# Altium PCB PCB7.PcbDoc (part 1 of 2)
Units mm, origin at the board's own origin, x right, y up, seen from the top; angles counter-clockwise.
Board outline 94.6 x 54.68 mm, 2 copper layers (Top Layer, Bottom Layer); 56 components, 165 nets, 539 pads, 324 vias.
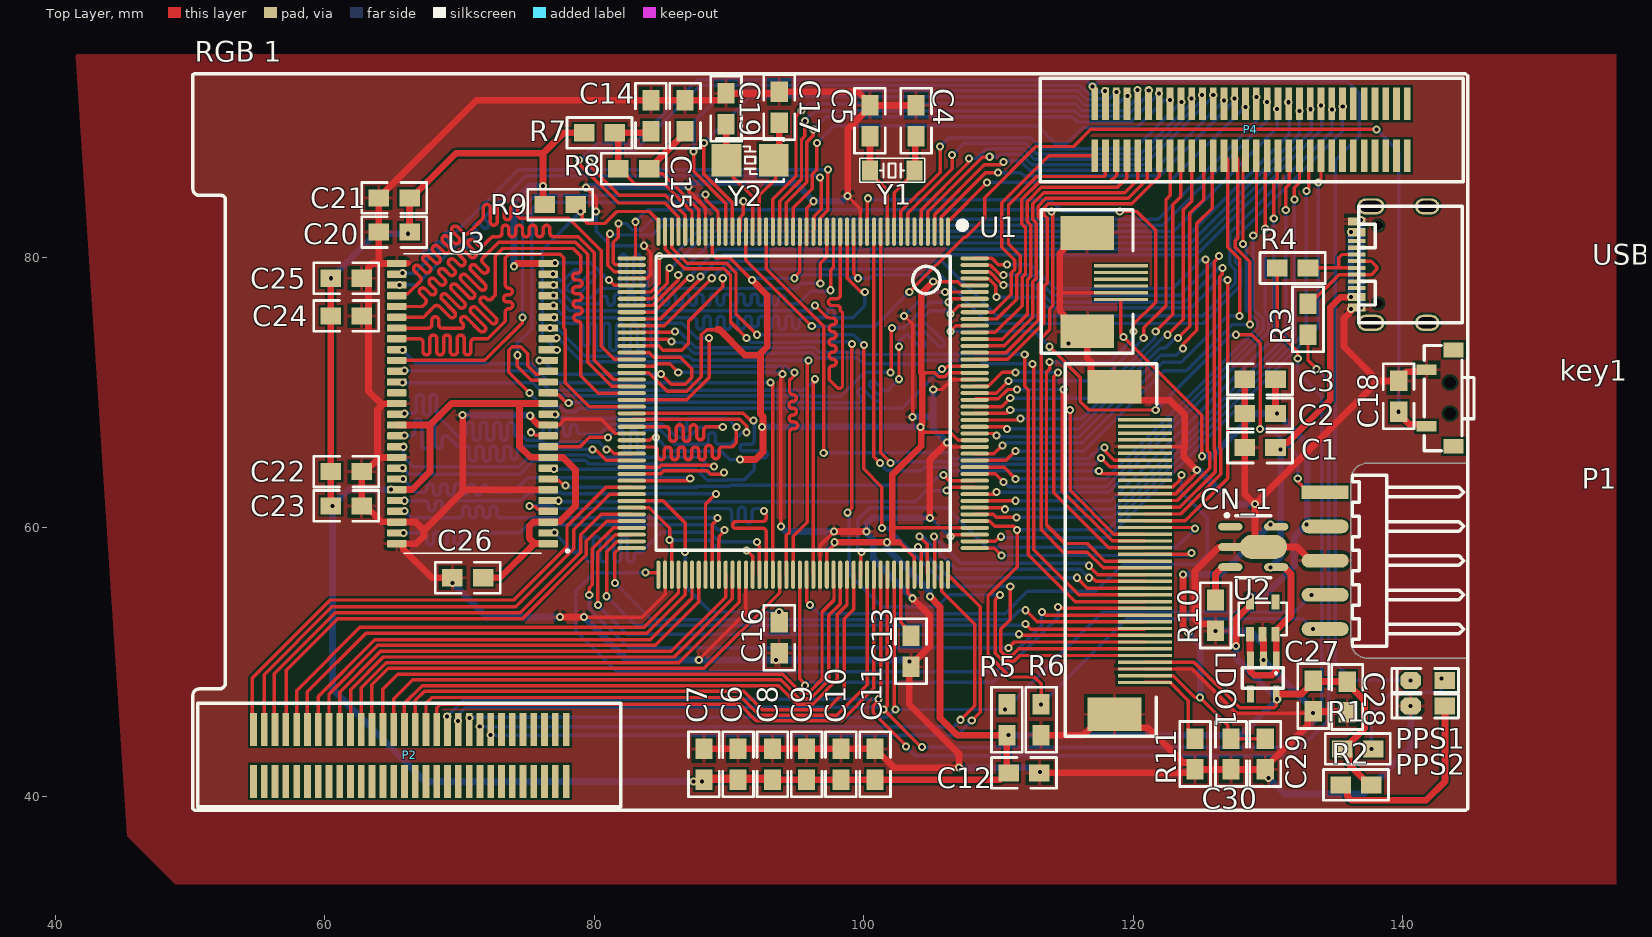
[diagram p0: Top Layer view]
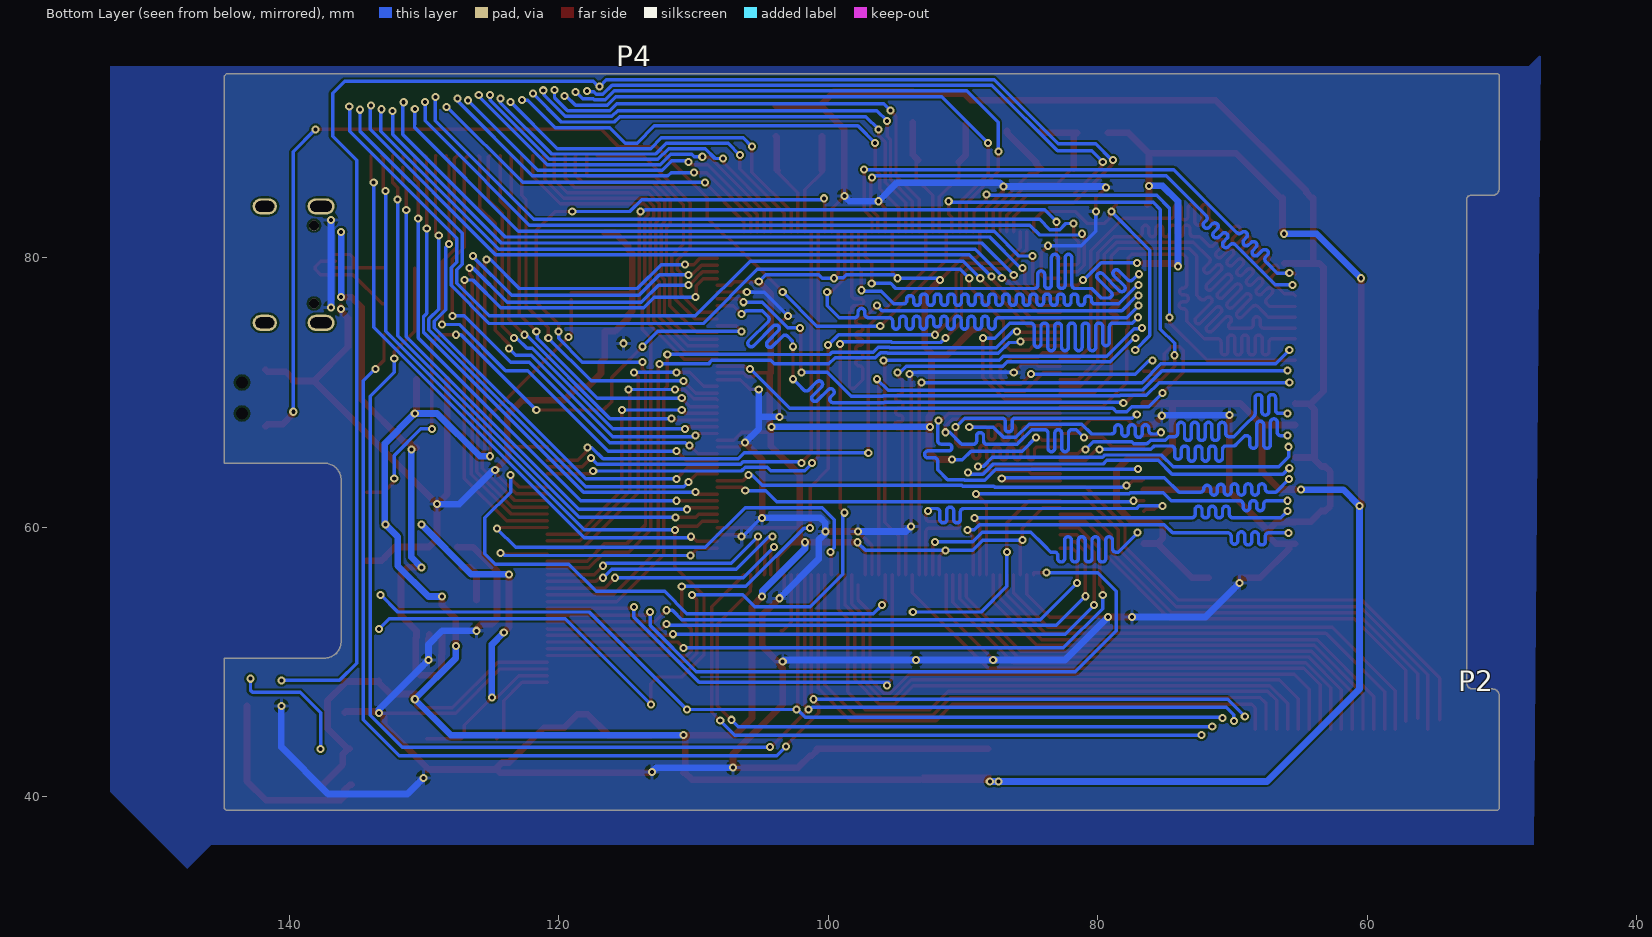
[diagram p1: Bottom Layer view, seen from below]

## Layer stack, top to bottom
Top Solder: solder mask 0.0102, Solder Resist, Dk 3.5
Top Layer: signal copper 0.0356
Dielectric 1: dielectric 0.32, FR-4, Dk 4.8
Bottom Layer: signal copper 0.0356
Bottom Solder: solder mask 0.0102, Solder Resist, Dk 3.5

## Board outline
50.215,39.109 50.334,38.99 144.678,38.99 144.812,39.124 144.812,50.26 ccw(c144.78,50.26) 144.78,50.292 137.414,50.292 cw(c137.414,51.562) 136.144,51.562 136.144,63.5 cw(c137.414,63.5) 137.414,64.77 144.78,64.77 ccw(c144.78,64.802) 144.812,64.802 144.812,93.506 144.647,93.672 50.309,93.672 50.215,93.577 50.215,85.117 ccw(c50.696,85.117) 50.696,84.635 50.687,84.633 52.306,84.633 cw(c52.306,84.311) 52.628,84.311 52.628,48.469 52.621,48.469 cw(c52.161,48.469) 52.161,48.01 50.672,48.01 50.672,48.003 ccw(c50.672,47.543) 50.213,47.543 50.215,47.55

## Design rules (kind name [scope] priority, off if disabled: settings)
Clearance [All] p1: gap=0.15 ignorepadtopadclearanceinfootprint=FALSE
Length Length_2 [InNetClass('fmc_nbl')] p1: maxlimit=49.654 minlimit=48.655
Length Length_1 [InNetClass('fmc_ba')] p2: maxlimit=37.389 minlimit=36.386
Length [InNetClass('fmc_data')] p3: maxlimit=33.236 minlimit=32.236
PolygonConnect [All] p1: connectstyle=Relief reliefconductorwidth=0.254 reliefentries=4 polygonreliefangle="90 Angle" airgapwidth=0.254
RoutingVias [All] p1: holewidth=0.711 width=1.27 viastyle="Through Hole" minholewidth=0.711 minwidth=1.27 maxholewidth=0.711 maxwidth=1.27
SolderMaskExpansion [All] p1: expansion=0.102 istentingtop=FALSE
Width [All] p1: maxlimit=1 minlimit=0.254 preferedwidth=0.254 minimp=50.000000 maximp=50.000000 favimp=50.000000
30 further rules are at their usual default settings.

## Classes and differential pairs
net class fmc_nbl: FMC_NBL0 FMC_NBL1
net class fmc_ba: FMC_BA0 FMC_BA1
net class fmc_data: FMC_D0 FMC_D1 FMC_D2 FMC_D3 FMC_D4 FMC_D5 FMC_D6 FMC_D7 FMC_D8 FMC_D9 FMC_D10 FMC_D11 FMC_D12 FMC_D13 FMC_D14 FMC_D15
net class fmc_add: FMC_A0 FMC_A1 FMC_A2 FMC_A3 FMC_A4 FMC_A5 FMC_A6 FMC_A7 FMC_A8 FMC_A9 FMC_A10 FMC_A11 FMC_A12

## Components (designator, comment, footprint, x,y, rotation, side; value= is the part's Value field where it differs from the comment)
C1 "Cap Semi" 0805C 130.556,65.913 r180 top value=105
C2 "Cap Semi" 0805C 128.27,68.453 r0 top value=104
C3 "Cap Semi" 0805C 128.27,70.993 r0 top value=105
C4 "" 0805C 103.886,91.313 r270 top value=10P
C5 "" 0805C 100.457,91.313 r270 top value=10P
C6 "" 0805C 90.678,41.275 r90 top value=104
C7 "" 0805C 88.138,41.275 r90 top value=104
C8 "" 0805C 93.218,41.275 r90 top value=104
C9 "" 0805C 95.758,41.275 r90 top value=104
C10 "" 0805C 98.298,41.275 r90 top value=104
C11 "" 0805C 100.838,41.275 r90 top value=106
C12 "" 0805C 110.744,41.783 r0 top value=104
C13 "" 0805C 103.505,51.943 r270 top value=2.2UF
C14 "" 0805C 84.201,91.694 r270 top value=104
C15 "" 0805C 86.741,89.408 r90 top value=104
C16 "" 0805C 93.726,52.959 r270 top value=2.2UF
C17 "" 0805C 93.726,90.043 r90 top value=20P
C18 "" 0805C 139.7,70.866 r270 top value=104
C19 "" 0805C 89.789,89.916 r90 top value=20P
C20 "104" 0805C 64.008,81.915 r0 top
C21 "104" 0805C 64.008,84.455 r0 top
C22 "104" 0805C 62.738,64.135 r180 top
C23 "104" 0805C 62.738,61.595 r180 top
C24 "104" 0805C 62.738,75.692 r180 top
C25 "104" 0805C 62.738,78.486 r180 top
C26 "104" 0805C 69.469,56.261 r0 top
C27 "105" 0805C 133.358,46.34 r90 top value=104
C28 "104" 0805C 135.881,46.268 r90 top
C29 "106" 0805C 129.794,44.323 r270 top value=104
C30 "106" 0805C 127.254,44.323 r270 top value=104
CN_1 "CN5710" LC-SOT-89-5 128.905,58.547 r180 top
key1 "KEY" "TSW 3*6*4.3-S-W" 143.51,69.596 r90 top
LDO1 "RT9193-33" SOT-23-5 128.067,48.514 r270 top
P1 "Header 5" HDR2.54-WS-5P 134.239,57.531 r270 top
P2 "Header 30X2" BTB60 66.308,43.053 r90 bottom
P4 "Header 30X2" BTB60 128.741,89.535 r270 bottom locked
PPS1 "LED" "LED 0805G" 141.859,48.641 r180 top
PPS2 "LED" "LED 0805G" 141.859,46.736 r180 top
R1 "1k" 0805R 137.795,43.561 r180 top
R2 "1k" 0805R 135.382,40.894 r0 top
R3 "0Ω" 0805R 132.969,76.581 r270 top
R4 "0Ω" 0805R 132.969,79.248 r180 top
R5 "10K" 0805R 110.617,44.577 r90 top
R6 "10K" 0805R 113.157,44.577 r90 top
R7 "0" 0805R 79.248,89.281 r0 top
R8 "0" 0805R 81.788,86.614 r0 top
R9 "10K" 0805R 76.327,83.947 r0 top
R10 "12K" 0805R 126.111,52.324 r90 top
R11 "0R" 0805R 124.587,44.323 r270 top
"RGB 1" "RGB800X480" RGB_800x480 50.239,39.017 r0 top locked
U1 "STM32H743IIT6" "LQFP176 24x24_M" 95.504,69.215 r180 top locked
U2 "RT9013" SOT23-5 129.606,53.27 r0 top
U3 "W9825G6KH-6" SOP80P1176X120-54N 70.961,69.189 r180 top locked
USBC1 "TYPE-C 3.1" TYPE-C-USB-17 139.192,79.502 r90 top
Y1 "32.768KHz" "OSC 3215-2P" 102.109,86.487 r0 top
Y2 "25M" "OSC 5032-2P" 91.567,87.249 r0 top

## Footprints (in the part's own frame and the unit in brackets; to place one, negate y for a bottom-side part, rotate by r counter-clockwise, add the part's x,y. Pads: shape width x height; smd on the part's side, far side on the other; paste and mask are expansions set on the pad)
0805C [mil] "2.0mmx1.2mm（蒜米工坊）"
  rect 60x50 smd: 1(0,0) 2(90,0)
  silkscreen extent -50,-45 140,45, body extent 5,-25 83,25, height 22
0805R [mil]
  rect 60x50 smd: 1(0,0) 2(90,0)
  silkscreen extent -50,-45 140,45, body extent 5,-25 83,25, height 22
BTB60 [mm]
  rect 2.44x0.5 smd far side: 1(-1.905,-11.594) 2(1.955,-11.594) 3(-1.905,-10.794) 4(1.955,-10.794) 5(-1.905,-9.994) 6(1.955,-9.994) 7(-1.905,-9.194) 8(1.955,-9.194) 9(-1.905,-8.394) 10(1.955,-8.394) 11(-1.905,-7.594) 12(1.955,-7.594) 13(-1.905,-6.794) 14(1.955,-6.794) 15(-1.905,-5.994) 16(1.955,-5.994) 17(-1.905,-5.194) 18(1.955,-5.194) 19(-1.905,-4.394) 20(1.955,-4.394) 21(-1.905,-3.594) 22(1.955,-3.594) 23(-1.905,-2.794) 24(1.955,-2.794) 25(-1.905,-1.994) 26(1.955,-1.994) 27(-1.905,-1.194) 28(1.955,-1.194) 29(-1.905,-0.394) 30(1.955,-0.394) 31(-1.905,0.406) 32(1.955,0.406) 33(-1.905,1.206) 34(1.955,1.206) 35(-1.905,2.006) 36(1.955,2.006) 37(-1.905,2.806) 38(1.955,2.806) 39(-1.905,3.606) 40(1.955,3.606) 41(-1.905,4.406) 42(1.955,4.406) 43(-1.905,5.206) 44(1.955,5.206) 45(-1.905,6.006) 46(1.955,6.006) 47(-1.905,6.806) 48(1.955,6.806) 49(-1.905,7.606) 50(1.955,7.606) 51(-1.905,8.406) 52(1.955,8.406) 53(-1.905,9.206) 54(1.955,9.206) 55(-1.905,10.006) 56(1.955,10.006) 57(-1.905,10.806) 58(1.955,10.806) 59(-1.905,11.606) 60(1.955,11.606)
HDR2.54-WS-5P [mm] "5P卧式贴片排针2.54"
  rect 1.02x3.5 smd: 1(-5.08,0)
  oval 1.02x3.5 smd: 2(-2.54,0) 3(0,0) 4(2.54,0) 5(5.08,0)
  silkscreen extent -6.35,2.03 6.35,10.29, body extent -6.35,-0.76 6.35,10.34, height 2.54
LC-SOT-89-5 [mm]
  oval 1.8x0.58 smd: 1(1.7,-1.5) 3(1.7,1.5) 4(-1.7,1.5) 5(-1.7,-1.5)
  oval 3.5x1.8 smd: 2(-0.75,0)
  oval 2.4x0.58 smd: 2(1.4,0)
  silkscreen extent -1.3,-2.47 2.07,2.3, body extent -2.17,-2.25 2.18,2.25, height 1.5
"LED 0805G" [mil] "绿色0805LED"
  rect 60x50 smd: 1(-50,0)
  oct 60x50 smd: 2(50,0)
  silkscreen extent -90,-35 105,35, body extent -39,-25 39,25, height 32
"LQFP176 24x24_M" [mm] "176脚，体宽24x24mm，脚距0.5mm"
  oval 0.3x2.1 smd: 1(-10.75,-12.727) 2(-10.25,-12.727) 3(-9.75,-12.727) 4(-9.25,-12.727) 5(-8.75,-12.727) 6(-8.25,-12.727) 7(-7.75,-12.727) 8(-7.25,-12.727) 9(-6.75,-12.727) 10(-6.25,-12.727) 11(-5.75,-12.727) 12(-5.25,-12.727) 13(-4.75,-12.727) 14(-4.25,-12.727) 15(-3.75,-12.727) 16(-3.25,-12.727) 17(-2.75,-12.727) 18(-2.25,-12.727) 19(-1.75,-12.727) 20(-1.25,-12.727) 21(-0.75,-12.727) 22(-0.25,-12.727) 23(0.25,-12.727) 24(0.75,-12.727) 25(1.25,-12.727) 26(1.75,-12.727) 27(2.25,-12.727) 28(2.75,-12.727) 29(3.25,-12.727) 30(3.75,-12.727) 31(4.25,-12.727) 32(4.75,-12.727) 33(5.25,-12.727) 34(5.75,-12.727) 35(6.25,-12.727) 36(6.75,-12.727) 37(7.25,-12.727) 38(7.75,-12.727) 39(8.25,-12.727) 40(8.75,-12.727) 41(9.25,-12.727) 42(9.75,-12.727) 43(10.25,-12.727) 44(10.75,-12.727) 89(10.75,12.727) 90(10.25,12.727) 91(9.75,12.727) 92(9.25,12.727) 93(8.75,12.727) 94(8.25,12.727) 95(7.75,12.727) 96(7.25,12.727) 97(6.75,12.727) 98(6.25,12.727) 99(5.75,12.727) 100(5.25,12.727) 101(4.75,12.727) 102(4.25,12.727) 103(3.75,12.727) 104(3.25,12.727) 105(2.75,12.727) 106(2.25,12.727) 107(1.75,12.727) 108(1.25,12.727) 109(0.75,12.727) 110(0.25,12.727) 111(-0.25,12.727) 112(-0.75,12.727) 113(-1.25,12.727) 114(-1.75,12.727) 115(-2.25,12.727) 116(-2.75,12.727) 117(-3.25,12.727) 118(-3.75,12.727) 119(-4.25,12.727) 120(-4.75,12.727) 121(-5.25,12.727) 122(-5.75,12.727) 123(-6.25,12.727) 124(-6.75,12.727) 125(-7.25,12.727) 126(-7.75,12.727) 127(-8.25,12.727) 128(-8.75,12.727) 129(-9.25,12.727) 130(-9.75,12.727) 131(-10.25,12.727) 132(-10.75,12.727)
  oval 2.1x0.3 smd: 45(12.727,-10.75) 46(12.727,-10.25) 47(12.727,-9.75) 48(12.727,-9.25) 49(12.727,-8.75) 50(12.727,-8.25) 51(12.727,-7.75) 52(12.727,-7.25) 53(12.727,-6.75) 54(12.727,-6.25) 55(12.727,-5.75) 56(12.727,-5.25) 57(12.727,-4.75) 58(12.727,-4.25) 59(12.727,-3.75) 60(12.727,-3.25) 61(12.727,-2.75) 62(12.727,-2.25) 63(12.727,-1.75) 64(12.727,-1.25) 65(12.727,-0.75) 66(12.727,-0.25) 67(12.727,0.25) 68(12.727,0.75) 69(12.727,1.25) 70(12.727,1.75) 71(12.727,2.25) 72(12.727,2.75) 73(12.727,3.25) 74(12.727,3.75) 75(12.727,4.25) 76(12.727,4.75) 77(12.727,5.25) 78(12.727,5.75) 79(12.727,6.25) 80(12.727,6.75) 81(12.727,7.25) 82(12.727,7.75) 83(12.727,8.25) 84(12.727,8.75) 85(12.727,9.25) 86(12.727,9.75) 87(12.727,10.25) 88(12.727,10.75) 133(-12.727,10.75) 134(-12.727,10.25) 135(-12.727,9.75) 136(-12.727,9.25) 137(-12.727,8.75) 138(-12.727,8.25) 139(-12.727,7.75) 140(-12.727,7.25) 141(-12.727,6.75) 142(-12.727,6.25) 143(-12.727,5.75) 144(-12.727,5.25) 145(-12.727,4.75) 146(-12.727,4.25) 147(-12.727,3.75) 148(-12.727,3.25) 149(-12.727,2.75) 150(-12.727,2.25) 151(-12.727,1.75) 152(-12.727,1.25) 153(-12.727,0.75) 154(-12.727,0.25) 155(-12.727,-0.25) 156(-12.727,-0.75) 157(-12.727,-1.25) 158(-12.727,-1.75) 159(-12.727,-2.25) 160(-12.727,-2.75) 161(-12.727,-3.25) 162(-12.727,-3.75) 163(-12.727,-4.25) 164(-12.727,-4.75) 165(-12.727,-5.25) 166(-12.727,-5.75) 167(-12.727,-6.25) 168(-12.727,-6.75) 169(-12.727,-7.25) 170(-12.727,-7.75) 171(-12.727,-8.25) 172(-12.727,-8.75) 173(-12.727,-9.25) 174(-12.727,-9.75) 175(-12.727,-10.25) 176(-12.727,-10.75)
  silkscreen extent -12.06,-13.46 10.92,10.92, body extent -13,-13 13,13, height 1.45
"OSC 3215-2P" [mm] "3.2*1.5*0.6mm(长宽高)"
  rect 1.2x1.5 smd: 1(-1.65,0) 2(1.65,0)
  silkscreen extent -2.41,-0.89 2.41,0.89, body extent -1.6,-0.75 1.6,0.75, height 0.61
"OSC 5032-2P" [mm] "5mm*3.2mm*0.8mm(长*宽*高)"
  rect 2.2x2.4 smd: 1(-1.75,0) 2(1.75,0)
  silkscreen extent -2.5,-1.6 2.5,1.6, body extent -2.5,-1.6 2.5,1.6, height 0.86
RGB_800x480 [mm]
  rect 4x0.25 smd: 1(70.618,9.474) 2(70.618,9.974) 3(70.618,10.474) 4(70.618,10.974) 5(70.618,11.474) 6(70.618,11.974) 7(70.618,12.474) 8(70.618,12.974) 9(70.618,13.474) 10(70.618,13.974) 11(70.618,14.474) 12(70.618,14.974) 13(70.618,15.474) 14(70.618,15.974) 15(70.618,16.474) 16(70.618,16.974) 17(70.618,17.474) 18(70.618,17.974) 19(70.618,18.474) 20(70.618,18.974) 21(70.618,19.474) 22(70.618,19.974) 23(70.618,20.474) 24(70.618,20.974) 25(70.618,21.474) 26(70.618,21.974) 27(70.618,22.474) 28(70.618,22.974) 29(70.618,23.474) 30(70.618,23.974) 31(70.618,24.474) 32(70.618,24.974) 33(70.618,25.474) 34(70.618,25.974) 35(70.618,26.474) 36(70.618,26.974) 37(70.618,27.474) 38(70.618,27.974) 39(70.618,28.474) 40(70.618,28.974) 41(68.848,40.394) 42(68.848,39.894) 43(68.848,39.394) 44(68.848,38.894) 45(68.848,38.394) 46(68.848,37.894)
  rect 4x2.5 smd: G1(68.371,7.112) G2(68.371,31.412) G3(66.347,35.532) G4(66.347,42.832)
  silkscreen extent -0.02,-0.02 94.58,54.66
SOP80P1176X120-54N [mm]
  rrect25% 1.44x0.54 smd: 1(-5.62,10.4) 2(-5.62,9.6) 3(-5.62,8.8) 4(-5.62,8) 5(-5.62,7.2) 6(-5.62,6.4) 7(-5.62,5.6) 8(-5.62,4.8) 9(-5.62,4) 10(-5.62,3.2) 11(-5.62,2.4) 12(-5.62,1.6) 13(-5.62,0.8) 14(-5.62,0) 15(-5.62,-0.8) 16(-5.62,-1.6) 17(-5.62,-2.4) 18(-5.62,-3.2) 19(-5.62,-4) 20(-5.62,-4.8) 21(-5.62,-5.6) 22(-5.62,-6.4) 23(-5.62,-7.2) 24(-5.62,-8) 25(-5.62,-8.8) 26(-5.62,-9.6) 27(-5.62,-10.4) 28(5.62,-10.4) 29(5.62,-9.6) 30(5.62,-8.8) 31(5.62,-8) 32(5.62,-7.2) 33(5.62,-6.4) 34(5.62,-5.6) 35(5.62,-4.8) 36(5.62,-4) 37(5.62,-3.2) 38(5.62,-2.4) 39(5.62,-1.6) 40(5.62,-0.8) 41(5.62,0) 42(5.62,0.8) 43(5.62,1.6) 44(5.62,2.4) 45(5.62,3.2) 46(5.62,4) 47(5.62,4.8) 48(5.62,5.6) 49(5.62,6.4) 50(5.62,7.2) 51(5.62,8) 52(5.62,8.8) 53(5.62,9.6) 54(5.62,10.4)
  silkscreen extent -7.16,-11.11 5.08,11.11, body extent -5.88,-11.11 5.88,11.11, height 1.2
SOT23-5 [mm]
  rect 0.6x1.1 smd: 1(-0.95,-1.2) 2(0,-1.2) 3(0.95,-1.2) 4(0.95,1.2) 5(-0.95,1.2)
  silkscreen extent -1.78,-1.27 1.78,1.14, body extent -1.55,-0.9 1.55,0.9, height 1.45
SOT-23-5 [mil]
  rect 50x20 smd: 1(-65,100) 2(-65,63) 3(-65,25) 4(35,25) 5(35,100)
  silkscreen extent -42,1 18,121
"TSW 3*6*4.3-S-W" [mm] "侧立贴片3*6*4.3"
  rect 1.1x1.5 smd: 0(-3.575,-0.25) 0(3.575,-0.25)
  round 0 hole 0.9: 0(-1.15,0) 0(1.15,0)
  rect 0.8x1.5 smd: 1(2.1,1.75) 2(-2.1,1.75)
  silkscreen extent -3.9,-1.78 3.9,1.91, body extent -3.9,-1.79 3.9,1.91, height 3.51
TYPE-C-USB-17 [mm]
  oval 1.2x1.8 hole 0.8 slot 1.4 at 90 deg: 0(-4.32,-2.624) 0(4.32,-2.624)
  oval 1.2x2 hole 0.8 slot 1.6 at 90 deg: 0(-4.32,1.556) 0(4.32,1.556)
  rect 0.3x1.3 smd: A1(-3.35,2.623) A4(-2.55,2.623) A5(-1.25,2.623) A6(-0.25,2.623) A7(0.25,2.623) A8(-1.75,2.624) A9(2.55,2.623) A12(3.35,2.623) B1(3.05,2.623) B4(2.25,2.623) B5(1.75,2.623) B6(0.75,2.623) B7(-0.75,2.623) B8(1.25,2.624) B9(-2.25,2.623) B12(-3.05,2.623)
  round 0.75 hole 0.75 unplated: ""(-2.89,1.026) ""(2.89,1.026)
  silkscreen extent -4.32,-5.23 4.32,2.47

## Part data
C1 C2 C3: "Capacitor (Semiconductor SIM Model)", LatestRevisionDate=29-May-2009, LatestRevisionNote="IPC-7351 Footprint Added.", PackageDescription="Chip Capacitor", PackageReference=C1206, Published=8-Jun-2000, Publisher="Altium Limited"
C4 C5 C6 C7 C8 C9 C10 C11 C13 C14 C15 C16 C17 C18 C19: library part Cap_1_1, "Capacitor", LatestRevisionDate=17-Jul-2002, LatestRevisionNote="Re-released for DXP Platform.", PackageDescription="Radial Cap, Thru-Hole; 2 Leads; 0.3 in Pin Spacing", PackageReference=RAD-0.3, Published=8-Jun-2000, Publisher="Altium Limited"
C12: library part Cap_1_1, "104", LatestRevisionDate=17-Jul-2002, LatestRevisionNote="Re-released for DXP Platform.", PackageDescription="Radial Cap, Thru-Hole; 2 Leads; 0.3 in Pin Spacing", PackageReference=RAD-0.3, Published=8-Jun-2000, Publisher="Altium Limited"
C20 C21 C22 C23 C24 C25 C26: library part CAP, "无极性电容"
C27 C28 C29 C30: library part Cap, "Capacitor", LatestRevisionDate=17-Jul-2002, LatestRevisionNote="Re-released for DXP Platform.", Published=8-Jun-2000, Publisher="Altium Limited"
LDO1: "3.3V超低压差LDO"
P1: "Header, 5-Pin"
P2 P4: "Header, 30-Pin, Dual row", LatestRevisionDate=17-Jul-2002, LatestRevisionNote="Re-released for DXP Platform.", Publisher="Altium Limited"
R1 R2 R3 R4 R5 R6 R7 R8: library part RES, "Resistor", LatestRevisionDate=17-Jul-2002, LatestRevisionNote="Re-released for DXP Platform.", PackageDescription="Axial Device, Thru-Hole; 2 Leads; 0.4 in Pin Spacing", PackageReference=AXIAL-0.4, Published=8-Jun-2000, Publisher="Altium Limited"
R9: library part RES
R10 R11: library part Res2, "Resistor", LatestRevisionDate=17-Jul-2002, LatestRevisionNote="Re-released for DXP Platform.", Published=8-Jun-2000, Publisher="Altium Limited"
"RGB 1": library part RGB_800X480
U1: BOM_LCSC Assembly=Yes, BOM_Manufacturer=STMicroelectronics, BOM_Manufacturer Part=STM32H743IIT6, BOM_Supplier=LCSC, BOM_Supplier Part=C89597, Contributor=LCSC, SMT Type=Extend, spicePre=U, spiceSymbolName=STM32H743IIT6
U3: library part IS42S16160B, "32MB SDRAM"
Y1 Y2: library part XTAL, "Crystal Oscillator", LatestRevisionDate=17-Jul-2002, LatestRevisionNote="Re-released for DXP Platform.", Published=8-Jun-2000, Publisher="Altium Limited"

## Via types
v1: diameter 0.6, hole 0.3, Top Layer to Bottom Layer, 324 vias

## Nets (pads, with @x,y where several pads share a name; then routed paths per layer and width w, separated by ;. In a path a pad name is that pad's centre, name@x,y a point inside that pad or via, vN(x,y) a via of type N, cw(c..) or ccw(c..) an arc to the next point about the centre after c; other vN are vias at no path point)
3.3V: "RGB 1.4" "RGB 1.46" C2.2 C3.2 C6.1 C7.1 C8.1 C9.1 C10.1 C11.1 C12.1 C20.2 C21.2 C22.2 C23.2 C24.2 C25.2 C26.2 C27.2 C28.2 LDO1.5 P1.2 R1.2 R2.2 R5.1 R7.1 R9.1 U1.15 U1.23 U1.36 U1.49 U1.62 U1.72 U1.82 U1.91 U1.103 U1.114 U1.127 U1.136 U1.149 U1.159 U1.172 U2.5 U3.1 U3.3 U3.9 U3.14 U3.27 U3.43 U3.49 | length 437.6
  Top Layer w0.254: v1(81.09,78.359) 81.483,77.965 U1.49@82.777,77.965 ; U1.82@82.777,61.465 84.069,61.465 85.598,59.936 v1(85.598,59.055) 85.754,58.899 U1.91@85.754,56.488 ; U1.72@82.777,66.465 84.118,66.465 84.328,66.675 v1(84.582,66.675) ; U1.62@82.777,71.465 84.056,71.465 85.417,70.104 86.868,70.104 87.942,71.178 87.942,74.28 88.338,74.676 89.154,74.676 ; U1.36@88.754,81.942 88.754,80.283 89.027,80.01 90.043,80.01 v1(91.694,78.359) ; v1(91.313,58.293) 91.754,57.852 U1.103@91.754,56.488 ; v1(94.869,78.486) 94.869,78.58 95.254,78.965 U1.23@95.254,81.942 ; U1.114@97.254,56.488 97.254,58.171 97.838,58.755 v1(97.838,58.896) ; U1.15@99.254,81.942 99.245,81.933 99.245,78.809 v1(99.568,78.486) ; 102.108,59.965 U1.136@108.231,59.965 ; 102.616,58.928 103.754,57.79 U1.127@103.754,56.488 ; 104.267,67.056 106.426,67.056 107.008,66.474 108.222,66.474 U1.149@108.231,66.465 ; 104.267,71.465 105.265,71.465 105.552,71.178 106.03,71.178 106.317,71.465 U1.159@108.231,71.465 ; v1(105.156,78.232) 106.96,78.232 107.227,77.965 U1.172@108.231,77.965 ; 119.087,76.911 119.087,74.328 v1(119.291,74.124) 125.095,68.32 v1(125.095,65.278) ; 120.857,49.991 124.507,49.991 127.889,46.609 130.458,46.609 130.607,46.758 LDO1.5@130.607,47.625
  Top Layer w0.5: C23.2@60.452,61.595 C22.2@60.452,64.135 C24.2@60.452,75.692 v1(60.452,78.486) ; U3.49@65.341,62.789 65.361,62.809 66.492,62.809 67.818,64.135 67.818,67.589 ; U3.43@65.341,67.589 67.818,67.589 ; C20.2@66.294,81.915 C21.2@66.294,84.455 66.421,84.455 69.723,87.757 76.2,87.757 ; C26.2@71.755,56.261 73.009,56.261 75.557,58.809 ; v1(74.041,79.375) 74.255,79.589 U3.27@76.581,79.589 ; R9.1@76.327,83.947 76.2,84.074 v1(76.2,85.344) 76.2,87.757 ; U3.1@76.581,58.789 76.561,58.809 75.557,58.809 ; U3.14@76.581,69.189 74.447,69.189 ; R7.1@79.248,89.281 77.724,89.281 76.2,87.757 ; 89.154,74.676 89.281,74.676 91.186,72.771 92.202,72.771 92.329,72.898 ; v1(90.805,65.024) 90.824,65.043 91.967,65.043 92.521,65.597 92.521,67.345 92.475,67.391 92.475,67.41 v1@92.502,67.437 ; v1(91.694,78.359) 92.837,77.216 92.837,73.406 92.329,72.898 ; v1@92.521,67.437 92.521,68.235 92.329,68.427 92.329,72.898 ; C8.1@93.218,41.275 C9.1@95.758,41.275 C10.1@98.298,41.275 C11.1@100.838,41.275 110.109,41.275 110.617,41.783 C12.1@110.744,41.783 110.617,41.91 R5.1@110.617,44.577 106.934,44.577 105.664,45.847 105.664,54.102 v1(104.902,54.864) ; v1@97.885,58.896 102.108,58.896 ; 102.584,58.896 102.108,58.896 ; v1(105.156,78.232) 104.267,77.343 104.267,71.465 104.332,71.4 104.332,67.656 104.159,67.483 104.159,67.464 104.186,67.437 104.159,67.41 104.159,67.391 104.267,67.283 104.267,67.056 104.267,66.04 102.108,63.881 102.108,59.965 102.108,58.896 ; v1(127.635,51.181) 127.635,53.199 128.656,54.22 U2.5@128.656,54.47 ; C2.2@130.556,68.453 C3.2@130.556,70.993 ; LDO1.5@130.607,47.625 132.484,47.625 133.358,48.499 C27.2@133.358,48.626 133.43,48.554 C28.2@135.881,48.554 135.881,48.427 137.16,47.148 137.16,45.085 R1.2@135.636,43.561 ; R1.2@135.509,43.561 R1.2@135.636,43.561 ; R2.2@137.668,40.894 137.541,40.894 136.021,42.414 136.021,43.176 R1.2@135.636,43.561 ; 67.818,67.589 69.418,69.189 74.447,69.189 ; 74.447,69.189 74.447,66.015 75.253,65.209 76.561,65.209 U3.9@76.581,65.189 77.686,65.189 78.613,64.262 78.613,61.595 77.427,60.409 76.601,60.409 U3.3@76.581,60.389 75.477,60.389 75.184,60.096 75.184,59.182 75.557,58.809
  Bottom Layer w0.254: v1(77.089,79.629) 79.756,79.629 81.026,78.359 v1(81.09,78.359) ; v1(84.582,66.675) 85.598,65.659 89.408,65.659 90.043,65.024 v1(90.805,65.024) ; v1(85.598,59.055) 88.519,59.055 89.281,58.293 v1(91.313,58.293) 97.234,58.293 v1(97.838,58.896) ; v1(91.694,78.359) 91.821,78.486 v1(94.869,78.486) 95.123,78.74 98.679,78.74 98.887,78.532 99.522,78.532 v1(99.568,78.486) 100.457,78.486 100.711,78.74 104.648,78.74 v1(105.156,78.232)
  Bottom Layer w0.5: v1(60.452,78.486) 63.754,81.788 v1(66.167,81.788) ; v1(64.923,62.796) 61.78,62.796 v1(60.579,61.595) 60.579,48.006 67.437,41.148 v1(87.376,41.148) v1(88.011,41.148) ; v1(74.041,79.375) 74.041,84.201 75.184,85.344 v1(76.2,85.344) ; v1(92.456,67.437) 92.48,67.461 v1(104.217,67.461) ; v1(101.718,58.896) 101.718,58.429 104.902,55.245 v1(104.902,54.864) ; v1(110.744,44.577) 128.016,44.577 v1(130.683,47.244) 127.635,50.292 v1(127.635,51.181) ; v1(125.095,65.278) 125.857,65.278 129.032,68.453 v1(130.683,68.453) ; v1(128.651,54.864) 129.667,54.864 131.953,57.15 131.953,59.309 v1(132.842,60.198) 132.907,60.263 132.907,66.229 v1@130.81,68.326
5V: C1.1 CN_1.4 LDO1.1 LDO1.3 U2.1 U2.3 USBC1.A4 USBC1.A9 USBC1.B4 USBC1.B9 | length 42.2
  Top Layer w0.5: U2.1@128.656,52.07 128.656,50.592 128.702,50.546 LDO1.3@128.702,50.165 128.706,50.161 128.706,49.315 128.999,49.022 129.413,49.022 130.302,49.022 130.603,49.323 130.603,50.161 LDO1.1@130.607,50.165 130.607,51.769 130.556,51.82 U2.3@130.556,52.07 130.556,52.32 131.699,53.463 131.699,56.541 131.193,57.047 CN_1.4@130.605,57.047 ; C1.1@130.556,65.913 130.937,65.913 130.937,66.167 131.068,66.298 131.449,66.298 134.62,69.469 134.62,76.327 135.363,77.07 136.125,77.07 v1(136.144,77.089)
  Bottom Layer w0.5: v1(130.175,57.023) 130.937,57.785 v1(130.937,65.786) ; v1(136.144,77.089) v1(136.144,81.915)
BOOT0: P1.1 U1.166 | length 45.2
  Top Layer w0.254: v1(106.426,74.549) 106.842,74.965 U1.166@108.231,74.965 ; v1(113.792,73.406) 116.078,71.12 116.078,69.319 116.69,68.707 v1(121.666,68.707) ; v1(127.635,74.295) 128.778,74.295 129.413,73.66 v1(129.413,67.31) ; v1@132.095,63.515 132.999,62.611 P1.1@134.239,62.611
  Bottom Layer w0.254: v1(106.426,74.549) 112.649,74.549 v1(113.792,73.406) ; v1(121.666,68.707) 127.254,74.295 v1(127.635,74.295) ; v1(129.413,67.31) 130.229,67.31 132.207,65.332 v1(132.207,63.627)
C0: U1.32 U3.16 | length 33.2
  Top Layer w0.254: v1(74.295,72.771) 74.295,71.945 75.308,70.932 76.438,70.932 U3.16@76.581,70.789 ; U1.32@90.754,81.942 90.827,82.015 90.827,83.019 91.059,83.251 v1(91.059,84.201)
  Bottom Layer w0.254: v1(74.295,72.771) 74.295,73.66 75.352,74.717 75.352,83.59 75.888,84.127 90.74,84.127 90.748,84.135 90.993,84.135 v1(91.059,84.201)
C1: P4.53 U1.33 | length 40.8
  Top Layer w0.254: v1(88.138,88.519) 88.138,86.223 90.254,84.107 U1.33@90.254,81.942
  Bottom Layer w0.254: v1(88.138,88.519) 91.567,91.948 115.77,91.948 116.393,91.325 118.757,91.325 v1@119.507,92.075
  other v1: 119.565,92.022
C2: P4.55 U1.34 | length 42
  Top Layer w0.254: v1(87.376,87.884) 87.376,86.414 89.754,84.036 U1.34@89.754,81.942
  Bottom Layer w0.254: v1(87.376,87.884) 87.376,90.076 89.709,92.409 115.88,92.409 116.561,91.729 117.373,91.729 117.451,91.806 118.222,91.806 v1@118.745,92.329
  other v1: 118.767,92.308
C3: U1.35 U3.37 | length 36.2
  Top Layer w0.254: U3.37@65.341,72.389 71.881,72.389 74.676,75.184 v1(74.676,75.565) ; v1(88.265,84.709) 88.265,84.328 89.181,83.412 89.181,82.015 U1.35@89.254,81.942
  Bottom Layer w0.254: v1(74.676,75.565) 74.676,83.693 75.623,84.64 88.196,84.64 v1(88.265,84.709)
FMC_A0: U1.16 U3.23 | length 42.3
  Top Layer w0.254: U1.16@98.754,81.942 98.763,81.933 98.763,78.475 99.768,77.47 v1(100.076,77.47)
  Bottom Layer w0.254: v1(76.962,76.454) 77.851,75.565 81.633,75.565 87.348,75.565 cw(c87.348,75.311) 87.602,75.311 87.602,74.963 ccw(c87.856,74.963) 88.11,74.963 88.11,75.415 cw(c88.364,75.415) 88.618,75.415 88.618,74.963 ccw(c88.872,74.963) 89.126,74.963 89.126,75.415 cw(c89.38,75.415) 89.634,75.415 89.634,74.963 ccw(c89.888,74.963) 90.142,74.963 90.142,75.415 cw(c90.396,75.415) 90.65,75.415 90.65,74.963 ccw(c90.904,74.963) 91.158,74.963 91.158,75.415 cw(c91.412,75.415) 91.666,75.415 91.666,75.126 ccw(c91.92,75.126) 92.174,75.126 92.174,75.415 cw(c92.428,75.415) 92.682,75.415 92.682,74.963 ccw(c92.936,74.963) 93.19,74.963 93.19,75.415 cw(c93.444,75.415) 93.698,75.415 93.698,74.963 ccw(c93.952,74.963) 94.206,74.963 94.206,75.415 cw(c94.46,75.415) 94.714,75.415 94.714,74.963 ccw(c94.968,74.963) 95.222,74.963 95.222,75.311 cw(c95.476,75.311) 95.476,75.565 96.117,75.565 96.901,75.565 97.028,75.565 ccw(c97.028,75.819) 97.282,75.819 97.282,75.994 cw(c97.536,75.994) 97.79,75.994 97.79,75.819 ccw(c98.044,75.819) 98.044,75.565 98.552,75.565 99.187,75.565 100.076,76.454 v1(100.076,77.47)
FMC_A1: U1.17 U3.24 | length 42.8
  Top Layer w0.254: v1(96.393,76.454) 97.057,75.79 97.184,75.663 97.185,75.662 ccw(c97.491,75.969) 97.491,75.536 97.703,75.536 cw(c97.703,75.282) 97.703,75.028 97.686,75.028 ccw(c97.686,74.774) 97.686,74.52 97.703,74.52 cw(c97.703,74.266) 97.703,74.012 97.686,74.012 ccw(c97.686,73.758) 97.686,73.504 97.703,73.504 cw(c97.703,73.25) 97.703,72.996 97.686,72.996 ccw(c97.686,72.742) 97.686,72.488 97.703,72.488 cw(c97.703,72.234) 97.703,71.98 97.688,71.98 ccw(c97.688,71.726) 97.434,71.725 97.435,71.094 97.435,70.967 98.066,70.336 98.276,70.336 98.425,70.485 98.425,75.913 98.254,76.084 98.254,76.211 ccw(c98,76.211) 98,76.465 97.626,76.465 cw(c97.626,76.719) 97.626,76.973 98,76.973 ccw(c98,77.227) 98.254,77.227 98.254,78.359 U1.17@98.254,81.942
  Bottom Layer w0.254: v1(76.962,77.216) 77.056,77.216 78.199,76.073 96.012,76.073 v1(96.393,76.454)
FMC_A2: U1.18 U3.25 | length 42.8
  Top Layer w0.254: v1(97.536,77.597) 97.536,79.088 97.754,79.306 U1.18@97.754,81.942
  Bottom Layer w0.254: v1(76.962,77.978) 77.053,77.978 78.45,76.581 80.08,76.581 80.207,76.581 ccw(c80.207,76.835) 80.461,76.835 80.461,76.914 cw(c80.715,76.914) 80.969,76.914 80.969,76.731 ccw(c81.223,76.731) 81.477,76.731 81.477,77.066 cw(c81.731,77.066) 81.985,77.066 81.985,76.731 ccw(c82.239,76.731) 82.493,76.731 82.493,77.066 cw(c82.747,77.066) 83.001,77.066 83.001,76.731 ccw(c83.255,76.731) 83.509,76.731 83.509,77.066 cw(c83.763,77.066) 84.017,77.066 84.017,76.731 ccw(c84.271,76.731) 84.525,76.731 84.525,77.066 cw(c84.779,77.066) 85.033,77.066 85.033,76.731 ccw(c85.287,76.731) 85.541,76.731 85.541,77.066 cw(c85.795,77.066) 86.049,77.066 86.049,76.731 ccw(c86.303,76.731) 86.557,76.731 86.557,77.066 cw(c86.811,77.066) 87.065,77.066 87.065,76.731 ccw(c87.319,76.731) 87.573,76.731 87.573,77.066 cw(c87.827,77.066) 88.081,77.066 88.081,76.731 ccw(c88.335,76.731) 88.589,76.731 88.589,77.066 cw(c88.843,77.066) 89.097,77.066 89.097,76.731 ccw(c89.351,76.731) 89.605,76.731 89.605,77.066 cw(c89.859,77.066) 90.113,77.066 90.113,76.731 ccw(c90.367,76.731) 90.621,76.731 90.621,77.066 cw(c90.875,77.066) 91.129,77.066 91.129,76.731 ccw(c91.383,76.731) 91.637,76.731 91.637,77.066 cw(c91.891,77.066) 92.145,77.066 92.145,76.731 ccw(c92.399,76.731) 92.653,76.731 92.653,77.066 cw(c92.907,77.066) 93.161,77.066 93.161,76.731 ccw(c93.415,76.731) 93.669,76.731 93.669,76.949 cw(c93.923,76.949) 94.177,76.949 94.177,76.835 ccw(c94.431,76.835) 94.431,76.581 95.123,76.581 96.07,77.528 97.467,77.528 v1(97.536,77.597)
FMC_A3: U1.19 U3.26 | length 42.8
  Top Layer w0.254: v1(96.774,78.105) 96.774,79.596 97.254,80.076 U1.19@97.254,81.942
  Bottom Layer w0.254: v1(76.943,78.786) 76.99,78.786 77.317,78.46 77.406,78.37 ccw(c77.586,78.549) 77.766,78.37 78.441,79.045 cw(c78.621,78.866) 78.8,79.045 cw(c78.621,78.866) 78.8,78.686 78.038,77.923 ccw(c78.217,77.744) 78.038,77.564 ccw(c78.217,77.744) 78.397,77.564 79.644,78.811 cw(c79.823,78.631) 80.003,78.811 cw(c79.823,78.631) 80.003,78.452 79.005,77.454 ccw(c79.184,77.274) 79.184,77.02 79.741,77.02 80.445,77.724 81.534,77.724 81.661,77.724 ccw(c81.661,77.978) 81.915,77.978 81.915,80.01 cw(c82.169,80.01) 82.423,80.01 82.423,77.978 ccw(c82.677,77.978) 82.931,77.978 82.931,80.01 cw(c83.185,80.01) 83.439,80.01 83.439,77.978 ccw(c83.693,77.978) 83.947,77.978 83.947,78.78 cw(c84.201,78.78) 84.455,78.78 84.455,77.978 ccw(c84.709,77.978) 84.709,77.724 85.471,77.724 94.996,77.724 95.377,78.105 v1(96.774,78.105)
FMC_A4: U1.20 U3.29 | length 43.3
  Top Layer w0.254: U3.29@65.341,78.789 65.419,78.867 v1(65.786,78.867) U3.29@65.786,78.789 ; U1.20@96.754,81.942 96.754,82.946 97.34,83.532 v1(97.34,86.545)
  Bottom Layer w0.254: v1(65.786,78.867) 66.675,78.867 67.437,79.629 67.527,79.719 ccw(c67.347,79.898) 67.527,80.078 67.419,80.186 cw(c67.598,80.366) 67.419,80.545 cw(c67.598,80.366) 67.778,80.545 68.108,80.215 ccw(c68.288,80.395) 68.468,80.215 ccw(c68.288,80.395) 68.468,80.574 68.264,80.777 cw(c68.444,80.957) 68.264,81.137 cw(c68.444,80.957) 68.624,81.137 68.784,80.976 ccw(c68.964,81.156) 69.143,80.976 ccw(c68.964,81.156) 69.143,81.335 68.964,81.515 cw(c69.143,81.694) 68.964,81.874 cw(c69.143,81.694) 69.323,81.874 ccw(c69.502,82.054) 69.682,81.874 69.977,82.169 74.353,86.545 v1(97.34,86.545)
FMC_A5: U1.21 U3.30 | length 42.7
  Top Layer w0.254: U3.30@65.341,77.989 v1(65.553,77.989) ; U1.21@96.254,81.942 96.208,81.988 96.327,82.107 96.327,83.09 96.843,83.606 96.843,85.888 v1(96.763,85.968)
  Bottom Layer w0.254: v1(65.553,77.989) 66.813,77.989 69.351,80.527 69.8,80.976 cw(c69.979,80.796) 70.159,80.976 70.304,80.831 ccw(c70.483,81.011) 70.663,80.831 ccw(c70.483,81.011) 70.663,81.19 70.414,81.44 cw(c70.593,81.619) 70.414,81.799 cw(c70.593,81.619) 70.773,81.799 71.022,81.549 ccw(c71.202,81.729) 71.381,81.549 ccw(c71.202,81.729) 71.381,81.909 71.132,82.158 cw(c71.312,82.338) 71.132,82.517 cw(c71.312,82.338) 71.491,82.517 71.741,82.268 ccw(c71.92,82.447) 72.1,82.268 ccw(c71.92,82.447) 72.1,82.627 71.955,82.772 cw(c72.135,82.951) 71.955,83.131 72.834,84.01 74.93,86.106 96.531,86.106 96.669,85.968 v1(96.763,85.968)
FMC_A6: U1.60 U3.31 | length 43.7
  Top Layer w0.254: U3.31@65.341,77.189 65.484,77.332 66.156,77.332 66.262,77.438 67.071,78.247 ccw(c66.891,78.426) 67.071,78.606 66.66,79.017 cw(c66.839,79.197) 66.66,79.376 cw(c66.839,79.197) 67.019,79.376 67.43,78.965 ccw(c67.61,79.145) 67.789,78.965 ccw(c67.61,79.145) 67.789,79.324 67.34,79.774 cw(c67.519,79.953) 67.34,80.133 cw(c67.519,79.953) 67.699,80.133 68.149,79.683 ccw(c68.328,79.863) 68.508,79.683 ccw(c68.328,79.863) 68.508,80.043 68.058,80.492 cw(c68.238,80.672) 68.058,80.851 cw(c68.238,80.672) 68.417,80.851 68.867,80.402 ccw(c69.047,80.581) 69.226,80.402 ccw(c69.047,80.581) 69.226,80.761 68.776,81.211 cw(c68.956,81.39) 68.776,81.57 cw(c68.956,81.39) 69.136,81.57 69.585,81.12 ccw(c69.765,81.3) 69.945,81.12 ccw(c69.765,81.3) 69.945,81.479 69.495,81.929 cw(c69.674,82.109) 69.495,82.288 cw(c69.674,82.109) 69.854,82.288 70.304,81.839 ccw(c70.483,82.018) 70.663,81.839 71.028,82.204 71.522,82.698 71.649,82.825 ccw(c71.342,83.131) 71.776,83.131 71.776,83.716 cw(c72.03,83.716) 72.284,83.716 72.284,82.681 ccw(c72.538,82.681) 72.792,82.681 72.792,83.716 cw(c73.046,83.716) 73.3,83.716 73.3,83.08 ccw(c73.554,83.08) 73.808,83.08 73.808,83.71 cw(c74.062,83.71) 74.316,83.71 74.316,83.185 ccw(c74.57,83.185) 74.57,82.931 75.057,82.931 78.105,82.931 80.513,80.523 80.513,73.438 81.485,72.465 U1.60@82.777,72.465
FMC_A7: U1.63 U3.32 | length 43.9
  Top Layer w0.254: U3.32@65.341,76.389 67.245,76.389 67.373,76.517 67.463,76.607 ccw(c67.284,76.787) 67.463,76.967 67.092,77.338 cw(c67.272,77.517) 67.092,77.697 cw(c67.272,77.517) 67.451,77.697 67.823,77.325 ccw(c68.002,77.505) 68.182,77.325 ccw(c68.002,77.505) 68.182,77.685 67.811,78.056 cw(c67.99,78.236) 67.811,78.415 cw(c67.99,78.236) 68.17,78.415 68.541,78.044 ccw(c68.721,78.223) 68.901,78.044 ccw(c68.721,78.223) 68.901,78.403 68.529,78.774 cw(c68.709,78.954) 68.529,79.134 cw(c68.709,78.954) 68.888,79.134 69.26,78.762 ccw(c69.44,78.942) 69.619,78.762 ccw(c69.44,78.942) 69.619,79.121 69.247,79.493 cw(c69.427,79.673) 69.247,79.852 cw(c69.427,79.673) 69.607,79.852 69.979,79.48 ccw(c70.158,79.66) 70.338,79.48 ccw(c70.158,79.66) 70.338,79.839 69.966,80.211 cw(c70.145,80.391) 69.966,80.571 cw(c70.145,80.391) 70.325,80.571 70.81,80.086 ccw(c70.99,80.265) 71.169,80.086 ccw(c70.99,80.265) 71.169,80.445 70.684,80.93 cw(c70.864,81.109) 70.684,81.289 cw(c70.864,81.109) 71.044,81.289 71.415,80.918 ccw(c71.594,81.097) 71.774,80.918 72.263,81.407 72.435,81.579 72.771,81.579 72.898,81.579 ccw(c72.898,81.833) 73.152,81.833 73.152,82.168 cw(c73.406,82.168) 73.66,82.168 73.66,81.818 ccw(c73.914,81.818) 74.168,81.818 74.168,82.168 cw(c74.422,82.168) 74.676,82.168 74.676,81.818 ccw(c74.93,81.818) 75.184,81.818 75.184,82.168 cw(c75.438,82.168) 75.692,82.168 75.692,81.818 ccw(c75.946,81.818) 76.2,81.818 76.2,82.165 cw(c76.454,82.165) 76.708,82.165 76.708,81.833 ccw(c76.962,81.833) 76.962,81.579 77.684,81.579 78.822,81.579 80.01,80.391 80.01,72.39 81.426,70.974 82.768,70.974 U1.63@82.777,70.965
FMC_A8: U1.64 U3.33 | length 43.5
  Top Layer w0.254: U3.33@65.341,75.589 67.334,75.589 67.691,75.946 68.14,76.395 cw(c68.32,76.215) 68.499,76.395 69.269,75.625 ccw(c69.449,75.804) 69.629,75.625 ccw(c69.449,75.804) 69.629,75.984 68.7,76.913 cw(c68.879,77.093) 68.7,77.272 cw(c68.879,77.093) 69.059,77.272 69.988,76.343 ccw(c70.168,76.523) 70.347,76.343 ccw(c70.168,76.523) 70.347,76.702 69.418,77.631 cw(c69.598,77.811) 69.418,77.991 cw(c69.598,77.811) 69.777,77.991 70.707,77.061 ccw(c70.886,77.241) 71.066,77.061 ccw(c70.886,77.241) 71.066,77.421 70.136,78.35 cw(c70.316,78.53) 70.136,78.709 cw(c70.316,78.53) 70.496,78.709 71.532,77.673 ccw(c71.711,77.853) 71.891,77.673 ccw(c71.711,77.853) 71.891,78.032 70.855,79.068 cw(c71.034,79.248) 70.855,79.428 cw(c71.034,79.248) 71.214,79.428 71.701,78.94 ccw(c71.881,79.12) 72.06,78.94 ccw(c71.881,79.12) 72.06,79.3 71.732,79.628 cw(c71.912,79.808) 71.732,79.987 72.905,81.16 73.145,81.16 78.606,81.16 79.502,80.264 79.502,72.263 81.3,70.465 U1.64@82.777,70.465
FMC_A9: U1.65 U3.34 | length 43.9
  Top Layer w0.254: U3.34@65.341,74.789 66.548,74.789 67.691,74.789 ccw(c67.691,75.043) 67.945,75.043 67.945,75.375 cw(c68.199,75.375) 68.453,75.375 68.453,75.043 ccw(c68.707,75.043) 68.707,74.789 69.977,74.789 70.044,74.789 70.217,74.789 70.22,74.792 ccw(c70.041,74.972) 70.22,75.151 70.152,75.219 cw(c70.332,75.399) 70.152,75.578 cw(c70.332,75.399) 70.512,75.578 71.517,74.573 ccw(c71.697,74.752) 71.877,74.573 ccw(c71.697,74.752) 71.877,74.932 70.871,75.938 cw(c71.05,76.117) 70.871,76.297 cw(c71.05,76.117) 71.23,76.297 72.346,75.181 ccw(c72.525,75.361) 72.705,75.181 ccw(c72.525,75.361) 72.705,75.54 71.589,76.656 cw(c71.769,76.836) 71.589,77.015 cw(c71.769,76.836) 71.949,77.015 72.016,76.947 ccw(c72.196,77.127) 72.375,76.947 72.644,77.216 72.644,77.24 72.644,80.137 73.199,80.692 78.439,80.692 78.994,80.137 78.994,79.756 78.994,79.121 cw(c78.74,79.121) 78.74,78.867 78.644,78.867 ccw(c78.644,78.613) 78.644,78.359 78.844,78.359 cw(c78.844,78.105) 78.844,77.851 78.644,77.851 ccw(c78.644,77.597) 78.644,77.343 78.844,77.343 cw(c78.844,77.089) 78.844,76.835 78.688,76.835 ccw(c78.688,76.581) 78.688,76.327 78.844,76.327 cw(c78.844,76.073) 78.844,75.819 78.74,75.819 ccw(c78.74,75.565) 78.74,75.311 cw(c78.74,75.057) 78.994,75.057 78.994,74.294 78.994,71.247 80.286,69.955 81.066,69.955 81.076,69.965 U1.65@82.777,69.965
FMC_A10: U1.66 U3.22 | length 42.2
  Top Layer w0.254: U1.66@82.777,69.465 86.864,69.465 88.519,71.12 v1(88.519,74.041)
  Bottom Layer w0.254: v1(77.006,75.59) 77.45,75.145 78.243,75.145 78.878,75.145 cw(c78.878,74.891) 79.132,74.891 79.132,73.735 ccw(c79.386,73.735) 79.64,73.735 79.64,74.907 cw(c79.894,74.907) 80.148,74.907 80.148,73.361 ccw(c80.402,73.361) 80.656,73.361 80.656,74.907 cw(c80.91,74.907) 81.164,74.907 81.164,73.361 ccw(c81.418,73.361) 81.672,73.361 81.672,74.907 cw(c81.926,74.907) 82.18,74.907 82.18,73.361 ccw(c82.434,73.361) 82.688,73.361 82.688,74.907 cw(c82.942,74.907) 83.196,74.907 83.196,73.361 ccw(c83.45,73.361) 83.704,73.361 83.704,74.907 cw(c83.958,74.907) 84.212,74.907 84.212,73.626 ccw(c84.466,73.626) 84.72,73.626 84.72,74.891 cw(c84.974,74.891) 84.974,75.145 85.725,75.145 86.526,75.145 87.63,74.041 v1(88.519,74.041)
FMC_A11: U1.67 U3.35 | length 43.9
  Top Layer w0.254: U3.35@65.341,73.989 65.387,73.989 65.392,73.989 67.038,73.989 cw(c67.038,73.735) 67.292,73.735 67.292,73.047 ccw(c67.546,73.047) 67.8,73.047 67.8,74.019 cw(c68.054,74.019) 68.308,74.019 68.308,73.047 ccw(c68.562,73.047) 68.816,73.047 68.816,74.019 cw(c69.07,74.019) 69.324,74.019 69.324,73.047 ccw(c69.578,73.047) 69.832,73.047 69.832,74.019 cw(c70.086,74.019) 70.34,74.019 70.34,73.047 ccw(c70.594,73.047) 70.848,73.047 70.848,73.735 cw(c71.102,73.735) 71.102,73.989 72.084,73.989 72.121,74.026 73.406,75.311 73.406,75.344 73.406,75.979 cw(c73.66,75.979) 73.66,76.233 73.696,76.233 ccw(c73.696,76.487) 73.696,76.741 73.524,76.741 cw(c73.524,76.995) 73.524,77.249 73.66,77.249 ccw(c73.66,77.503) 73.66,77.757 cw(c73.66,78.011) 73.406,78.011 73.406,78.757 73.406,80.01 73.66,80.264 77.47,80.264 77.724,80.01 77.724,74.803 77.851,74.676 77.851,70.739 79.625,68.965 U1.67@82.777,68.965
FMC_A12: U1.106 U3.36 | length 42.9
  Top Layer w0.254: v1(93.091,70.739) 93.091,70.866 93.254,70.703 U1.106@93.254,56.488
  Bottom Layer w0.254: v1(65.786,73.152) 66.802,72.136 75.311,72.136 76.708,70.739 v1(93.091,70.739)
FMC_BA0: U1.108 U3.20 | length 36.1
  Top Layer w0.254: U1.108@94.254,56.488 94.254,59.402 94.488,59.636 94.488,66.427 94.488,67.062 cw(c94.742,67.062) 94.742,67.316 94.841,67.316 ccw(c94.841,67.57) 94.841,67.824 94.708,67.824 cw(c94.708,68.078) 94.708,68.332 94.754,68.332 ccw(c94.754,68.586) 94.754,68.84 94.708,68.84 cw(c94.708,69.094) 94.708,69.348 94.742,69.348 ccw(c94.742,69.602) 94.742,69.856 cw(c94.742,70.11) 94.488,70.11 94.488,70.772 94.488,70.905 94.803,71.22 94.803,71.415 v1(94.869,71.481)
  Bottom Layer w0.254: v1(77.184,74.041) 77.343,74.041 79.085,72.299 86.705,72.299 87.053,71.951 94.219,71.951 94.689,71.481 v1(94.869,71.481)
FMC_BA1: U1.109 U3.21 | length 36.5
  Top Layer w0.254: U1.109@94.754,56.488 94.754,59.331 95.816,60.393 95.816,72.321 v1(95.885,72.39)
  Bottom Layer w0.254: v1(76.729,74.804) 76.795,74.737 77.304,74.737 79.338,72.703 87.009,72.703 87.322,72.39 v1(95.885,72.39)
FMC_D0: U1.104 U3.2 | length 32.1
  Top Layer w0.254: v1(92.075,58.928) 92.075,58.801 92.254,58.622 U1.104@92.254,56.488
  Bottom Layer w0.254: v1(77.041,59.616) 78.269,58.387 78.49,58.166 78.65,58.166 ccw(c78.65,58.42) 78.904,58.42 78.904,59.049 cw(c79.158,59.049) 79.412,59.049 79.412,57.685 ccw(c79.666,57.685) 79.92,57.685 79.92,59.049 cw(c80.174,59.049) 80.428,59.049 80.428,57.685 ccw(c80.682,57.685) 80.936,57.685 80.936,59.049 cw(c81.19,59.049) 81.444,59.049 81.444,57.685 ccw(c81.698,57.685) 81.952,57.685 81.952,59.049 cw(c82.206,59.049) 82.46,59.049 82.46,57.685 ccw(c82.714,57.685) 82.968,57.685 82.968,57.912 cw(c83.222,57.912) 83.222,58.166 83.497,58.166 84.022,58.691 84.963,59.632 88.577,59.632 89.281,58.928 v1(92.075,58.928)
FMC_D1: U1.105 U3.4 | length 32
  Top Layer w0.254: v1(75.184,61.595) 75.233,61.546 75.59,61.546 75.804,61.332 76.438,61.332 U3.4@76.581,61.189 ; v1(92.583,61.214) 92.583,61.194 92.583,61.12 92.754,60.949 92.754,60.689 cw(c92.5,60.689) 92.5,60.435 90.517,60.435 ccw(c90.517,60.181) 90.517,59.927 92.5,59.927 cw(c92.5,59.673) 92.754,59.673 92.754,59.546 U1.105@92.754,56.488
  Bottom Layer w0.254: v1(75.184,61.595) 76.908,61.595 77.104,61.399 88.284,61.399 89.935,61.399 cw(c89.935,61.145) 90.189,61.145 90.189,60.584 ccw(c90.443,60.584) 90.697,60.584 90.697,61.249 cw(c90.951,61.249) 91.205,61.249 91.205,60.584 ccw(c91.459,60.584) 91.713,60.584 91.713,61.145 cw(c91.967,61.145) 91.967,61.399 92.469,61.399 92.505,61.399 v1@92.575,61.329
FMC_D2: U1.142 U3.5 | length 32.3
  Top Layer w0.254: U3.5@76.581,61.989 v1@77.428,61.989 ; v1(77.343,61.976) 77.416,61.976 v1@77.428,61.988 ; v1(106.158,62.724) 106.399,62.965 U1.142@108.231,62.965
  Bottom Layer w0.254: v1(77.343,61.976) 77.412,61.907 103.817,61.907 104.634,62.724 v1(106.158,62.724)
FMC_D3: U1.143 U3.7 | length 32.4
  Top Layer w0.254: U3.7@76.581,63.589 76.724,63.446 77.397,63.446 77.658,63.185 77.785,63.185 v1(77.851,63.119) ; v1(105.918,63.881) 106.325,63.474 108.222,63.474 U1.143@108.231,63.465
  Bottom Layer w0.254: v1(77.851,63.119) 77.917,63.053 78.112,63.053 78.173,62.992 87.63,62.992 87.699,63.061 90.015,63.061 90.085,63.131 104.903,63.131 105.653,63.881 v1(105.918,63.881)
FMC_D4: U1.68 U3.8 | length 31.9
  Top Layer w0.254: U1.68@82.777,68.465 91.071,68.465 v1@91.706,67.83
  Bottom Layer w0.254: v1(77.008,64.343) 77.054,64.297 87.584,64.297 88.401,63.481 89.864,63.481 89.918,63.535 91.148,63.535 91.879,64.266 91.879,64.277 91.879,64.912 cw(c92.133,64.912) 92.133,65.166 92.595,65.166 ccw(c92.595,65.42) 92.595,65.674 91.072,65.674 cw(c91.072,65.928) 91.072,66.182 91.625,66.182 ccw(c91.625,66.436) 91.879,66.436 91.879,67.183 91.879,67.887 v1(91.821,67.945)
FMC_D5: U1.69 U3.10 | length 32.2
  Top Layer w0.254: U3.10@76.581,65.989 78.943,65.989 79.629,66.675 v1(81.026,66.675) ; U1.69@82.777,67.965 82.826,68.014 90.79,68.014 91.302,67.502 v1(91.302,67.056)
  Bottom Layer w0.254: v1(81.026,66.675) 81.407,67.056 81.603,67.252 81.915,67.252 cw(c81.915,66.998) 82.169,66.998 82.169,65.867 ccw(c82.423,65.867) 82.677,65.867 82.677,66.998 cw(c82.931,66.998) 83.185,66.998 83.185,65.867 ccw(c83.439,65.867) 83.693,65.867 83.693,66.998 cw(c83.947,66.998) 83.947,67.252 84.582,67.252 84.894,67.252 85.808,66.338 85.979,66.167 88.221,66.167 ccw(c88.221,66.421) 88.475,66.421 88.475,66.779 cw(c88.729,66.779) 88.983,66.779 88.983,66.421 ccw(c89.237,66.421) 89.237,66.167 90.097,66.167 90.154,66.224 90.986,67.056 v1(91.302,67.056)
FMC_D6: U1.70 U3.11 | length 32.6
  Top Layer w0.254: v1(75.311,67.056) 75.405,67.056 75.636,66.825 76.545,66.825 U3.11@76.581,66.789 ; U1.70@82.777,67.465 83.679,67.465 85.33,67.465 cw(c85.33,67.211) 85.584,67.211 85.584,66.634 ccw(c85.838,66.634) 86.092,66.634 86.092,67.356 cw(c86.346,67.356) 86.6,67.356 86.6,66.634 ccw(c86.854,66.634) 87.108,66.634 87.108,67.356 cw(c87.362,67.356) 87.616,67.356 87.616,66.749 ccw(c87.87,66.749) 88.124,66.749 88.124,67.211 cw(c88.378,67.211) 88.378,67.465 89.238,67.465 89.507,67.465 v1(89.535,67.437)
  Bottom Layer w0.254: v1(75.311,67.056) 75.377,66.99 75.572,66.99 75.633,66.929 75.819,66.929 75.946,66.929 ccw(c75.946,67.183) 76.2,67.183 76.2,67.356 cw(c76.454,67.356) 76.708,67.356 76.708,66.934 ccw(c76.962,66.934) 77.216,66.934 77.216,67.356 cw(c77.47,67.356) 77.724,67.356 77.724,67.021 ccw(c77.978,67.021) 78.232,67.021 78.232,67.356 cw(c78.486,67.356) 78.74,67.356 78.74,67.183 ccw(c78.994,67.183) 78.994,66.929 79.466,66.929 80.444,66.929 81.171,67.656 85.09,67.656 86.071,66.675 86.995,66.675 87.757,67.437 v1(89.535,67.437)
FMC_D7: U1.73 U3.13 | length 31.9
  Top Layer w0.254: U1.73@82.777,65.965 83.805,65.965 84.44,65.965 cw(c84.44,65.711) 84.694,65.711 84.694,65.266 ccw(c84.948,65.266) 85.202,65.266 85.202,65.712 cw(c85.456,65.712) 85.71,65.712 85.71,65.266 ccw(c85.964,65.266) 86.218,65.266 86.218,65.712 cw(c86.472,65.712) 86.726,65.712 86.726,65.266 ccw(c86.98,65.266) 87.234,65.266 87.234,65.712 cw(c87.488,65.712) 87.742,65.712 87.742,65.266 ccw(c87.996,65.266) 88.25,65.266 88.25,65.829 cw(c88.504,65.829) 88.758,65.829 88.758,65.347 ccw(c89.012,65.347) 89.266,65.347 89.266,65.711 cw(c89.52,65.711) 89.52,65.965 90.007,65.965 90.222,65.965 90.551,66.294 v1(90.551,67.437)
  Bottom Layer w0.254: v1(77.103,68.377) 77.16,68.377 77.425,68.112 85.471,68.112 86.106,68.112 cw(c86.106,67.858) 86.36,67.858 86.36,67.333 ccw(c86.614,67.333) 86.868,67.333 86.868,67.858 cw(c87.122,67.858) 87.122,68.112 87.63,68.112 89.876,68.112 v1(90.551,67.437)
FMC_D8: U1.74 U3.42 | length 31.9
  Top Layer w0.254: v1(80.899,65.786) 81.153,65.786 81.474,65.465 U1.74@82.777,65.465
  Bottom Layer w0.254: v1(65.913,68.453) 66.421,68.453 66.548,68.453 ccw(c66.548,68.707) 66.802,68.707 66.802,69.603 cw(c67.056,69.603) 67.31,69.603 67.31,68.586 ccw(c67.564,68.586) 67.818,68.586 67.818,69.603 cw(c68.072,69.603) 68.326,69.603 68.326,68.431 ccw(c68.58,68.431) 68.4,68.252 69.004,67.648 69.919,66.733 70.13,66.733 70.257,66.733 ccw(c70.257,66.987) 70.511,66.987 70.511,67.536 cw(c70.765,67.536) 71.019,67.536 71.019,66.698 ccw(c71.273,66.698) 71.527,66.698 71.527,67.545 cw(c71.781,67.545) 72.035,67.545 72.035,66.698 ccw(c72.289,66.698) 72.543,66.698 72.543,67.545 cw(c72.797,67.545) 73.051,67.545 73.051,66.698 ccw(c73.305,66.698) 73.559,66.698 73.559,67.545 cw(c73.813,67.545) 74.067,67.545 74.067,66.987 ccw(c74.321,66.987) 74.321,66.733 74.714,66.733 74.734,66.733 74.988,66.479 76.075,66.479 76.342,66.212 77.315,66.212 77.466,66.363 80.322,66.363 v1(80.899,65.786)
FMC_D9: U1.75 U3.44 | length 31.9
  Top Layer w0.254: v1(79.883,65.786) 80.083,65.786 80.904,64.965 U1.75@82.777,64.965
  Bottom Layer w0.254: v1(65.913,66.802) 66.294,66.802 66.421,66.802 ccw(c66.421,67.056) 66.675,67.056 66.675,67.795 cw(c66.929,67.795) 67.183,67.795 67.183,66.121 ccw(c67.437,66.121) 67.691,66.121 67.691,67.628 cw(c67.945,67.628) 68.199,67.628 68.199,66.121 ccw(c68.453,66.121) 68.707,66.121 68.707,66.548 cw(c68.961,66.548) 68.961,66.802 69.088,66.802 69.596,66.294 69.85,66.04 70.485,66.04 cw(c70.485,65.786) 70.739,65.786 70.739,65.167 ccw(c70.993,65.167) 71.247,65.167 71.247,65.786 cw(c71.501,65.786) 71.755,65.786 71.755,65.167 ccw(c72.009,65.167) 72.263,65.167 72.263,65.786 cw(c72.517,65.786) 72.771,65.786 72.771,65.167 ccw(c73.025,65.167) 73.279,65.167 73.279,65.786 cw(c73.533,65.786) 73.787,65.786 73.787,65.308 ccw(c74.041,65.308) 74.295,65.308 74.295,65.786 cw(c74.549,65.786) 74.549,66.04 75.819,66.04 76.073,65.786 v1(79.883,65.786)
FMC_D10: U1.76 U3.45 | length 31.1
  Top Layer w0.254: U1.76@82.777,64.465 84.819,64.465 84.962,64.608 88.808,64.608 v1(88.9,64.516)
  Bottom Layer w0.254: v1(65.833,65.98) 65.833,65.231 66.563,64.501 74.407,64.501 75.276,65.37 79.483,65.37 79.644,65.209 87.815,65.209 88.508,64.516 v1(88.9,64.516)
FMC_D11: U1.77 U3.47 | length 32
  Top Layer w0.254: U1.77@82.777,63.965 84.92,63.965 85.159,64.204 88.387,64.204 88.652,63.939 89.506,63.939 v1(89.625,64.058)
  Bottom Layer w0.254: v1(65.786,64.389) 65.811,64.389 66.254,63.946 74.487,63.946 75.507,64.966 79.316,64.966 79.581,64.701 87.752,64.701 88.514,63.939 89.506,63.939 v1(89.625,64.058)
FMC_D12: U1.78 U3.48 | length 32.1
  Top Layer w0.254: U1.78@82.777,63.465 86.96,63.465 v1(87.122,63.627)
  Bottom Layer w0.254: v1(65.792,63.592) 66.773,62.611 67.183,62.611 67.31,62.611 ccw(c67.31,62.865) 67.564,62.865 67.564,62.973 cw(c67.818,62.973) 68.072,62.973 68.072,62.649 ccw(c68.326,62.649) 68.58,62.649 68.58,62.973 cw(c68.834,62.973) 69.088,62.973 69.088,62.649 ccw(c69.342,62.649) 69.596,62.649 69.596,62.973 cw(c69.85,62.973) 70.104,62.973 70.104,62.649 ccw(c70.358,62.649) 70.612,62.649 70.612,62.95 cw(c70.866,62.95) 71.12,62.95 71.12,62.649 ccw(c71.374,62.649) 71.628,62.649 71.628,62.865 cw(c71.882,62.865) 72.136,62.865 ccw(c72.39,62.865) 72.39,62.611 73.152,62.611 73.972,62.611 75.057,63.696 87.053,63.696 v1(87.122,63.627)
FMC_D13: U1.96 U3.50 | length 31.8
  Top Layer w0.254: U1.96@88.254,56.488 88.254,61.711 v1(89.027,62.484)
  Bottom Layer w0.254: v1(65.913,61.976) 66.802,61.976 67.437,61.976 cw(c67.437,61.722) 67.691,61.722 67.691,61.49 ccw(c67.945,61.49) 68.199,61.49 68.199,61.737 cw(c68.453,61.737) 68.707,61.737 68.707,61.49 ccw(c68.961,61.49) 69.215,61.49 69.215,61.722 cw(c69.469,61.722) 69.469,61.976 69.977,61.976 74.549,61.976 75.126,62.553 77.582,62.553 77.651,62.484 v1(89.027,62.484)
FMC_D14: U1.97 U3.51 | length 31.6
  Top Layer w0.254: U1.97@88.754,56.488 88.754,60.212 89.154,60.612 v1(89.154,60.706)
  Bottom Layer w0.254: v1(65.913,61.214) 66.421,60.706 69.85,60.706 69.977,60.706 ccw(c69.977,60.96) 70.231,60.96 70.231,61.318 cw(c70.485,61.318) 70.739,61.318 70.739,60.955 ccw(c70.993,60.955) 71.247,60.955 71.247,61.318 cw(c71.501,61.318) 71.755,61.318 71.755,60.955 ccw(c72.009,60.955) 72.263,60.955 72.263,61.318 cw(c72.517,61.318) 72.771,61.318 72.771,60.96 ccw(c73.025,60.96) 73.025,60.706 74.041,60.706 v1@89.053,60.706